# Altium PCB board.PcbDoc
Units mil, origin at the board's own origin, x right, y up, seen from the top; angles counter-clockwise.
Board outline 2755.91 x 1181.1 mil, 2 copper layers (Top Layer, Bottom Layer); 51 components, 43 nets, 225 pads, 159 vias.
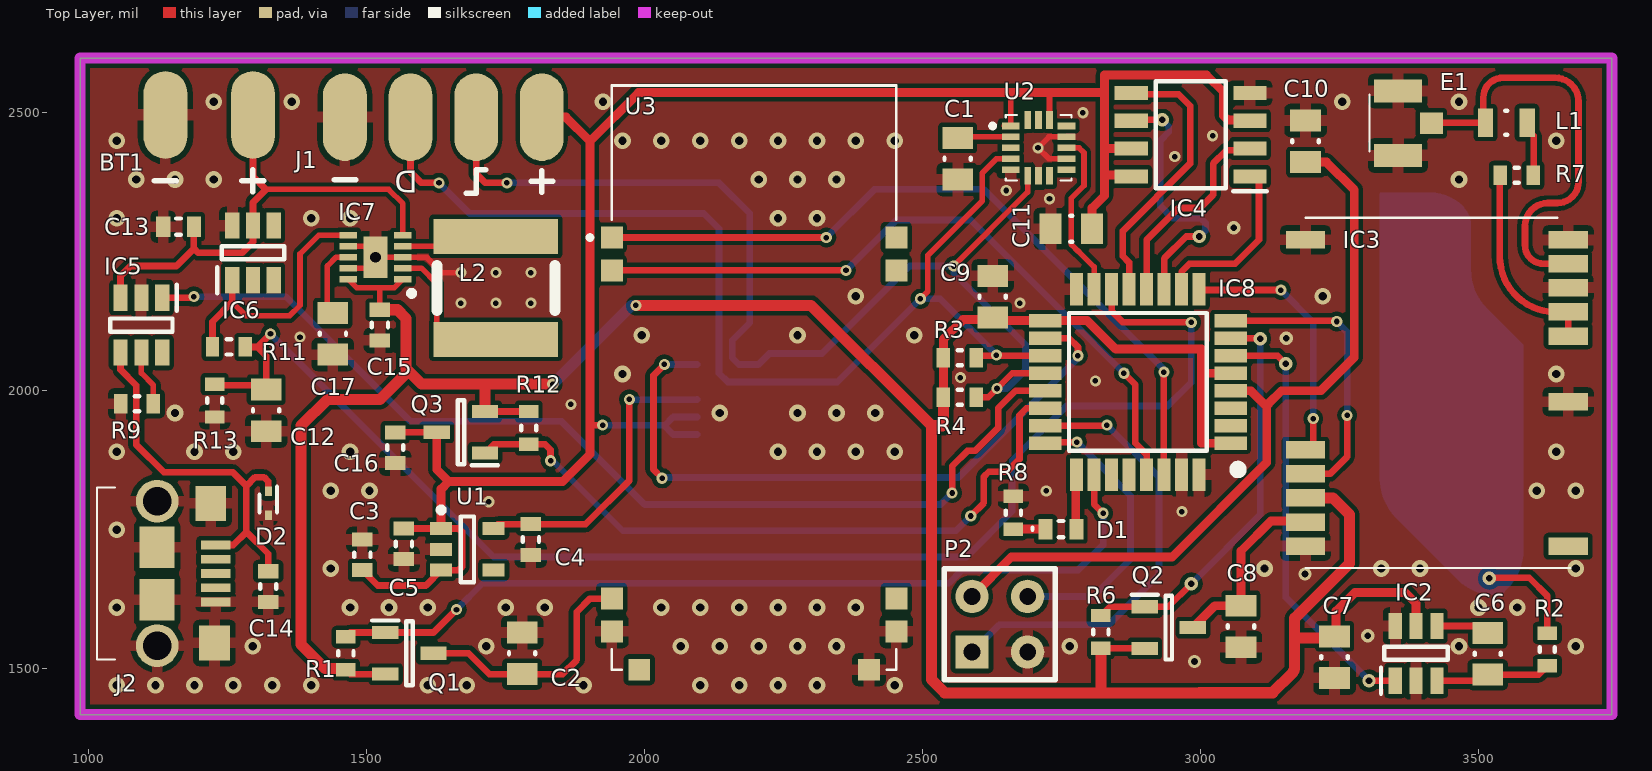
[diagram p0: Top Layer view]
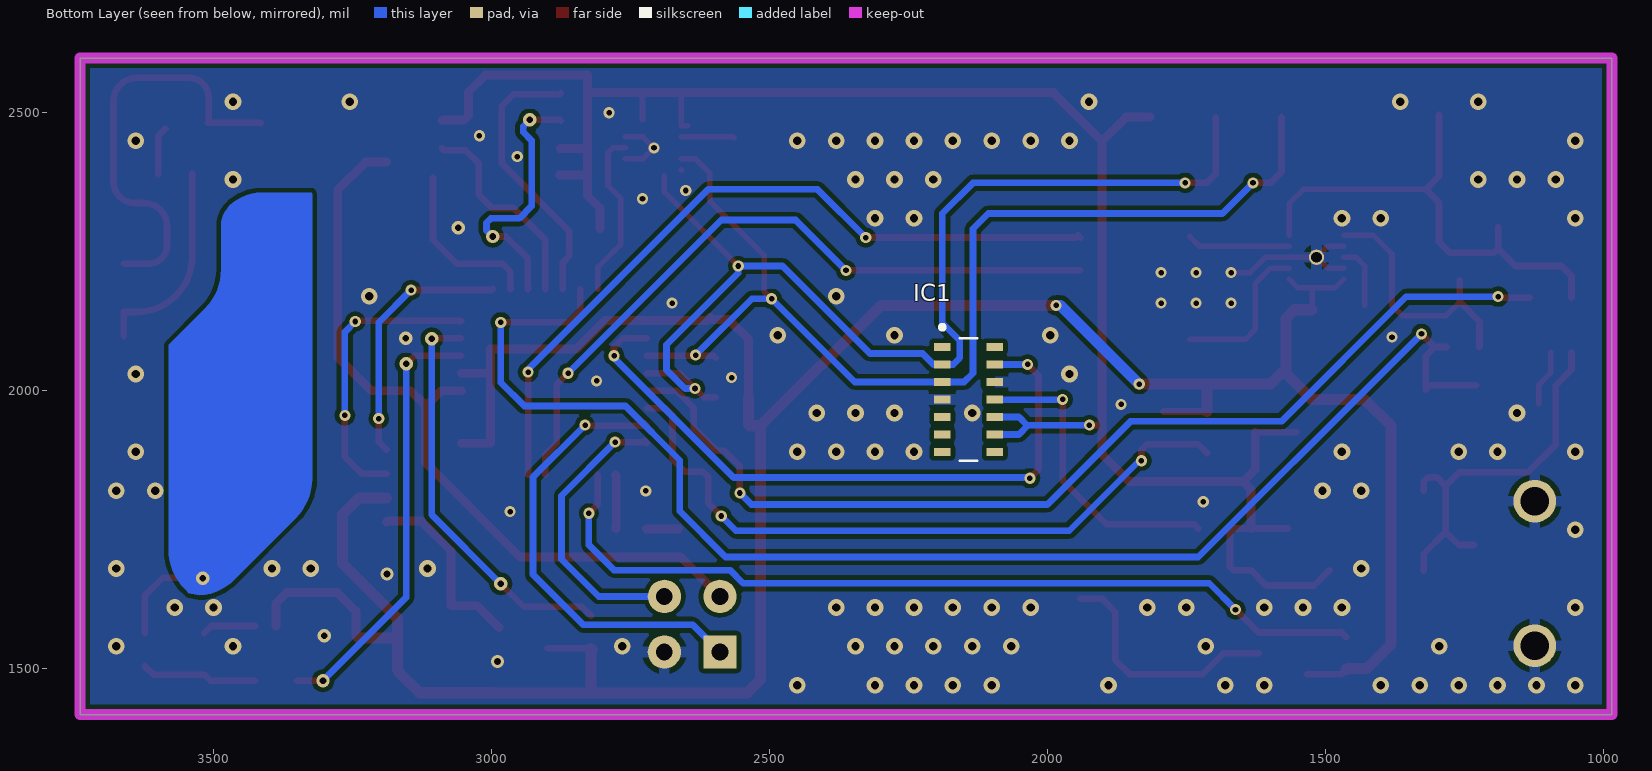
[diagram p1: Bottom Layer view, seen from below]
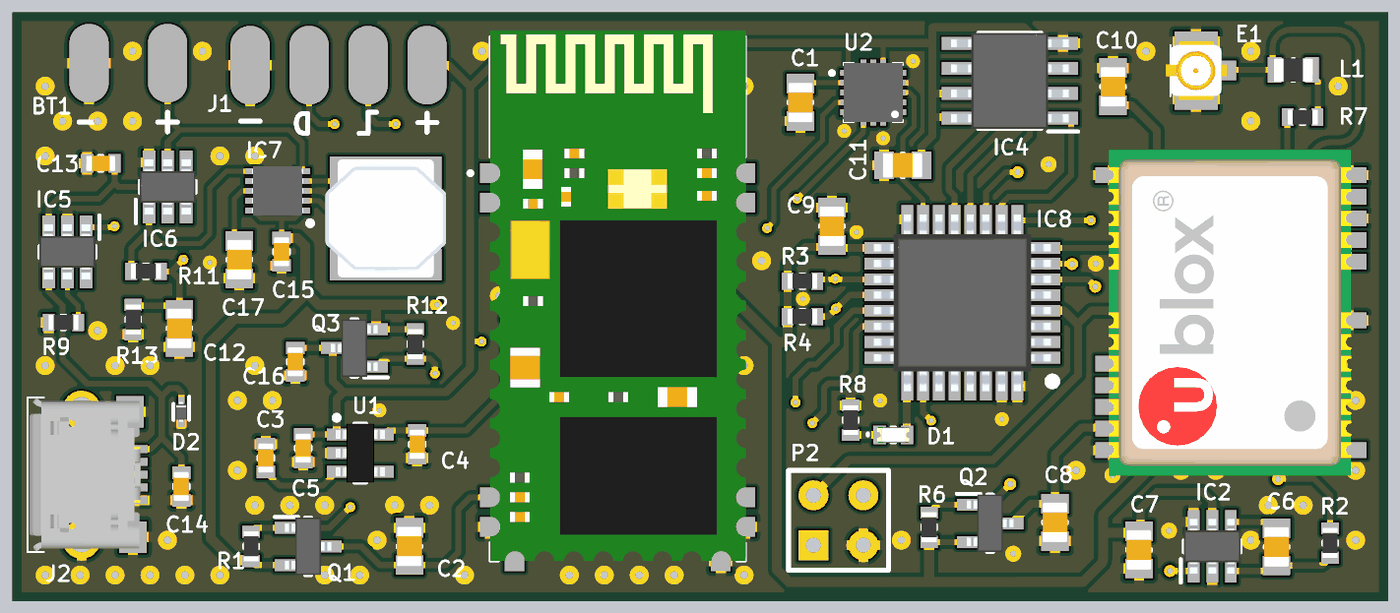
[diagram p2: 3D render of the assembled board from above, using the file's embedded part models]

## Layer stack, top to bottom
Top Solder: solder mask 0.4, Solder Resist, Dk 3.5
Top Layer: signal copper 1.4
Dielectric 1: dielectric 12.6, FR-4, Dk 4.8
Bottom Layer: signal copper 1.4
Bottom Solder: solder mask 0.4, Solder Resist, Dk 3.5

## Board outline
984.25,1417.32 3740.16,1417.32 3740.16,2598.43 984.25,2598.43

## Design rules (kind name [scope] priority, off if disabled: settings)
BoardOutlineClearance [All] p1: gap=7.87 ignorepadtopadclearanceinfootprint=FALSE except(15.75: Arc-SplitBarrior Arc-SplitContinuation Track-SplitBarrior Track-SplitContinuation SMDPad-SplitBarrior SMDPad-SplitContinuation THPad-SplitBarrior THPad-SplitContinuation Via-SplitBarrior Via-SplitContinuation Fill-SplitBarrior Fill-SplitContinuation Poly-SplitBarrior Poly-SplitContinuation Region-SplitBarrior Region-SplitContinuation Text-SplitBarrior Text-SplitContinuation)
Clearance "Clearance Bottom Layer" [OnLayer('Bottom Layer')] p1: gap=8 ignorepadtopadclearanceinfootprint=TRUE except(10: Arc-Text Track-Text SMDPad-Text THPad-Text Via-Text Fill-Text Poly-Text Region-Text Text-Text)
Clearance "Clearance Top Layer" [OnLayer('Top Layer')] p2: gap=8 ignorepadtopadclearanceinfootprint=TRUE except(10: Arc-Text Track-Text SMDPad-Text THPad-Text Via-Text Fill-Text Poly-Text Region-Text Text-Text)
Clearance [All] p3: gap=7.87 ignorepadtopadclearanceinfootprint=FALSE except(3.5: Arc-Arc Arc-Track Arc-SMDPad Track-Track Track-SMDPad SMDPad-SMDPad; 5: Arc-Via Track-Via SMDPad-Via THPad-Via Via-Via; 10: Arc-Text Track-Text SMDPad-Text THPad-Text Via-Text Fill-Text Poly-Text Region-Text Text-Text)
HoleSize [All] p1: absolutevalues=TRUE maxlimit=248.03 minlimit=7.87 maxpercent=80.000 minpercent=20.000
MinimumAnnularRing [All] p1: minimumring=3
MinimumSolderMaskSliver [All] p1: minsoldermaskwidth=3.94
PolygonConnect PolygonConnect_1 [All] p1: thpad.connectstyle=Relief thpad.reliefconductorwidth=20 thpad.reliefentries=4 thpad.polygonreliefangle="90 Angle" thpad.airgapwidth=10 smdpad.connectstyle=Relief smdpad.reliefconductorwidth=20 smdpad.reliefentries=4 smdpad.polygonreliefangle="90 Angle" smdpad.airgapwidth=10 via.connectstyle=Direct via.reliefconductorwidth=20 via.reliefentries=4 via.polygonreliefangle="90 Angle" via.airgapwidth=10
RoutingCorners [All] p1: cornerstyle=Round minsetback=100 maxsetback=100
RoutingVias [All] p1: holewidth=19.68 width=39.37 viastyle="Through Hole" minholewidth=7.87 minwidth=17.72 maxholewidth=39.37 maxwidth=78.74
SilkToSilkClearance [All] p1: silktosilkclearance=3.94
SilkToSolderMaskClearance [IsPad] p1: minsilkscreentomaskgap=3.94 clearancetoexposedcopper=TRUE
SolderMaskExpansion [All] p1: expansion=4
Width [All] p1: maxlimit=100 minlimit=3.5 preferedwidth=15
25 further rules are at their usual default settings.

## Classes and differential pairs
component class U_zasilanie: BT1 C12 C13 C14 C15 C16 C17 D2 IC5 IC6 IC7 J2 L2 Q3 R9 R11 R12 R13
component class U_pamiec_zewnetrzna: C11 IC4
component class U_oled: J1
component class U_mikrokontroler: C9 C10 D1 IC8 P2 R3 R4 R8
component class U_GPS: C8 E1 IC3 L1 Q2 R6 R7
component class U_czujnik_tetna: C3 C4 C5 IC1 U1
component class U_czujnik_dotyku: C6 C7 IC2 R2
component class U_bluetooth: C2 Q1 R1 U3
component class U_akcelerometr: C1 U2

## Components (designator, comment, footprint, x,y, rotation, side; value= is the part's Value field where it differs from the comment)
BT1 "Battery" BAT_PAD 1295.28,2496.06 r180 top
C1 "Cap" C0805 2562.99,2417.32 r90 top value=100nF
C2 "Cap" C0805 1779.53,1527.56 r270 top value=100nF
C3 "Cap" cap-0603 1492.13,1704.72 r270 top value=1uF
C4 "Cap" cap-0603 1795.28,1732.28 r90 top value=1uF
C5 "Cap" cap-0603 1566.93,1724.41 r90 top value=1uF
C6 "Cap" C0805 3516.73,1526.57 r270 top value=10nF
C7 "Cap" C0805 3241.14,1520.67 r90 top value=100nF
C8 "Cap" C0805 3072.83,1575.79 r90 top value=100nF
C9 "Cap" C0805 2625.98,2169.29 r270 top value=100nF
C10 "Cap" C0805 3188.98,2448.82 r270 top value=100nF
C11 "Cap" C0805 2767.72,2291.34 r0 top value=100nF
C12 "Cap" C0805 1318.9,1964.57 r90 top value=100nF
C13 "Cap" cap-0603 1161.42,2295.28 r0 top value=1uF
C14 "Cap" cap-0603 1322.83,1647.64 r90 top value=10uF
C15 "Cap" cap-0603 1523.62,2118.11 r90 top value=10uF
C16 "Cap" cap-0603 1551.18,1897.64 r90 top value=1uF
C17 "Cap" C0805 1438.98,2102.36 r90 top value=100nF
D1 "LL-S192PUAC-2A" LED_0603 2749.02,1750.98 r0 top
D2 "ESD9L5.0ST5G" SODFL1006X40N 1322.83,1797.24 r270 top
E1 "SMT" UFLRSMT160 3355.32,2481.3 r90 top
IC1 "MAX30102" MAX30102EFDT 2141.73,1984.25 r180 bottom
IC2 "AT42QT1010-TSHR" SOT95P280X145-6N 3387.8,1527.56 r90 top
IC3 "GPS" NEO6M0001_only_used_pins 3444.88,1996.06 r0 top
IC4 "AT25SF161-SSHD-B" SOIC127P600X175-8N 2982.28,2460.63 r180 top
IC5 "MCP73811T-420IT" SOT95P280X135-6N 1094.49,2118.11 r270 top
IC6 "DW01A-G" SOT95P280X135-6N 1295.28,2248.03 r90 top
IC7 "TPS63031" SON50P250X250X80-11N-D 1515.75,2240.16 r180 top
IC8 "STM32L031K6T6" QFP80P900X900X160-32N 2887.32,2015.75 r180 top
J1 "Pads for wires to solder" OLED_PAD 1814.96,2492.13 r180 top
J2 "Micro USB" 101181930001LF 1125.98,1671.26 r270 top
L1 "Inductor" L-0805 3550.2,2482.28 r180 top value=27uH
L2 "DJNR6028-1R5-S" DJNR6028-1R5-S 1732.28,2185.04 r270 top value=1.5uH
P2 "Header 2X2" 2x2_header 2988.98,1629.92 r90 top
Q1 "FDN306P" SOT95P237X112-3N 1576.77,1527.56 r0 top
Q2 "FDN306P" SOT95P237X112-3N 2942.91,1573.82 r0 top
Q3 "FDN306P" SOT95P237X112-3N 1669.29,1925.2 r180 top
R1 "Res3" R0603 1462.6,1527.56 r270 top value=100k
R2 "Res3" R0603 3624.02,1534.45 r90 top value=10k
R3 "Res3" R0603 2566.93,2059.06 r180 top value=2K2
R4 "Res3" R0603 2566.93,1988.19 r180 top value=2K2
R6 "Res3" R0603 2820.87,1565.94 r270 top value=100k
R7 "" R0603 3568.9,2387.8 r0 top value=22R
R8 "Res3" R0603 2663.39,1780.51 r270 top value=150R
R9 "Res3" R0603 1086.61,1976.38 r0 top value=12k
R11 "Res3" R0603 1251.97,2078.74 r0 top value=33k
R12 "Res3" R0603 1791.34,1933.07 r90 top value=100k
R13 "Res3" R0603 1226.38,1982.28 r270 top value=10k
U1 "MIC5504" SOT23-5 1681.1,1714.57 r0 top
U2 "MMA8452Q" QFN-16 2708.66,2437.01 r0 top
U3 "HC-06" HC-06_footprint_minimal_pin_number 2196.85,2019.68 r0 top locked

## Footprints (in the part's own frame and the unit in brackets; to place one, negate y for a bottom-side part, rotate by r counter-clockwise, add the part's x,y. Pads: shape width x height; smd on the part's side, far side on the other; paste and mask are expansions set on the pad)
2x2_header [mil]
  rect 60x60 hole 30: 1(-100,400)
  round 60 hole 30: 2(0,400) 3(0,300) 4(-100,300)
  silkscreen extent -150,250 50,450
101181930001LF [mm] "microUSB footprint"
  rect 0.4x1.35 smd: 1(-1.3,2.6) 2(-0.65,2.6) 3(0,2.6) 4(0.65,2.6) 5(1.3,2.6)
  round 1.95 hole 1.3: 6(-3.3,-0.075) 6(3.3,-0.075)
  rect 1.6x1.4 smd: 6(-3.2,2.375) 6(3.175,2.54)
  rect 1.9x1.6 smd: 6(-1.2,-0.075) 6(1.2,-0.075)
  silkscreen extent -3.93,-2.83 3.93,-2, body extent -3.93,-2.74 3.93,2.92, height 2.81
BAT_PAD [mm]
  oval 2x4 smd: 1(0,0) 2(4,0)
  silkscreen extent -0.5,2.5 4.5,3.5
C0805 [mm]
  rect 1x1.4 smd: 1(-0.95,0) 2(0.95,0)
  silkscreen extent -0.05,-0.6 0.05,0.6, body extent -1.01,-0.64 1.01,0.64, height 0.56
cap-0603 [mm]
  rect 0.64x0.94 smd: 1(-0.7,0) 2(0.7,0)
  silkscreen extent -0.1,-0.37 0.1,0.37, body extent -0.75,-0.4 0.75,0.4, height 0.5
DJNR6028-1R5-S [mm]
  rect 1.6x5.7 smd: 1(-2.35,0) 2(2.35,0)
  silkscreen extent -1.02,-2.7 1.02,2.7, body extent -3,-3.07 3,3.07, height 2.58
HC-06_footprint_minimal_pin_number [mm]
  rect 1x1 smd: 1(-6.5,6.5) 2(-6.5,5) 12(-6.5,-10) 13(-6.5,-11.5) 14(-5.25,-13.25) 21(5.25,-13.25) 22(6.5,-11.5) 23(6.5,-10) 33(6.5,5) 34(6.5,6.5)
  silkscreen extent -7.6,-13.25 6.5,13.45, body extent -6.48,-13.25 6.52,13.75, height 4.32
L-0805 [mm]
  rect 0.7x1.3 smd: 1(-0.95,0) 2(0.95,0)
  silkscreen extent -0.05,-0.55 0.05,0.55, body extent -1,-0.6 1,0.6, height 0.5
LED_0603 [mm]
  rect 0.64x0.94 smd: 1(0.7,0) 2(-0.7,0)
  silkscreen extent -1.3,-0.37 0.1,0.37, body extent -0.81,-0.4 0.81,0.4, height 0.6
MAX30102EFDT [mm]
  rect 0.75x0.35 smd: 1(-1.2,2.4) 2(-1.2,1.6) 3(-1.2,0.8) 4(-1.2,0) 5(-1.2,-0.8) 6(-1.2,-1.6) 7(-1.2,-2.4) 8(1.2,-2.4) 9(1.2,-1.6) 10(1.2,-0.8) 11(1.2,0) 12(1.2,0.8) 13(1.2,1.6) 14(1.2,2.4)
  silkscreen extent -1.3,-2.8 0.4,3.4, body extent -1.65,-2.8 1.65,2.8, height 1.75
NEO6M0001_only_used_pins [mm]
  rect 1.8x0.8 smd: 1(5.5,-7) 7(5.5,-0.4) 8(5.5,2.6) 9(5.5,3.7) 10(5.5,4.8) 11(5.5,5.9) 12(5.5,7) 13(-6.5,7) 20(-6.5,-2.6) 21(-6.5,-3.7) 22(-6.5,-4.8) 23(-6.5,-5.9) 24(-6.5,-7)
  silkscreen extent -6.5,-8 5.6,8, body extent -6.73,-8.3 5.63,8.3, height 2.64
OLED_PAD [mm]
  oval 2x4 smd: 1(0,0) 2(3,0) 3(6,0) 4(9,0)
  silkscreen extent -0.5,2.4 9.48,3.47
QFN-16 [mm]
  rect 0.813x0.305 smd: 1(-1.275,1) 2(-1.275,0.5) 3(-1.275,0) 4(-1.275,-0.5) 5(-1.275,-1) 9(1.275,-1) 10(1.275,-0.5) 11(1.275,0) 12(1.275,0.5) 13(1.275,1)
  rect 0.305x0.813 smd: 6(-0.5,-1.275) 7(0,-1.275) 8(0.5,-1.275) 14(0.5,1.275) 15(0,1.275) 16(-0.5,1.275)
  silkscreen extent -2.2,-1.5 1.5,1.5, body extent -1.5,-1.5 1.5,1.5, height 1.06
QFP80P900X900X160-32N [mm]
  rect 1.475x0.6 smd: 1(-4.238,2.8) 2(-4.238,2) 3(-4.238,1.2) 4(-4.238,0.4) 5(-4.238,-0.4) 6(-4.238,-1.2) 7(-4.238,-2) 8(-4.238,-2.8) 17(4.238,-2.8) 18(4.238,-2) 19(4.238,-1.2) 20(4.238,-0.4) 21(4.238,0.4) 22(4.238,1.2) 23(4.238,2) 24(4.238,2.8)
  rect 0.6x1.475 smd: 9(-2.8,-4.238) 10(-2,-4.238) 11(-1.2,-4.238) 12(-0.4,-4.238) 13(0.4,-4.238) 14(1.2,-4.238) 15(2,-4.238) 16(2.8,-4.238) 25(2.8,4.238) 26(2,4.238) 27(1.2,4.238) 28(0.4,4.238) 29(-0.4,4.238) 30(-1.2,4.238) 31(-2,4.238) 32(-2.8,4.238)
  silkscreen extent -4.77,-3.15 3.15,4.2, body extent -4.5,-4.5 4.5,4.5, height 1.6
R0603 [mil]
  rect 24x35 smd: 1(-29.5,0) 2(29.5,0)
  silkscreen extent -4,-14 4,14, body extent -30,-15 30,15, height 18
SODFL1006X40N [mm]
  rect 0.43x0.32 smd: 1(-0.55,0) 2(0.55,0)
  silkscreen extent -0.76,-0.4 0.4,0.4, body extent -0.5,-0.3 0.5,0.3, height 0.4
SOIC127P600X175-8N [mm]
  rect 1.525x0.65 smd: 1(-2.712,1.905) 2(-2.712,0.635) 3(-2.712,-0.635) 4(-2.712,-1.905) 5(2.712,-1.905) 6(2.712,-0.635) 7(2.712,0.635) 8(2.712,1.905)
  silkscreen extent -3.47,-2.45 1.6,2.58, body extent -3,-2.45 3,2.45, height 1.75
SON50P250X250X80-11N-D [mm]
  rect 0.8x0.3 smd: 1(-1.25,1) 2(-1.25,0.5) 3(-1.25,0) 4(-1.25,-0.5) 5(-1.25,-1) 6(1.25,-1) 7(1.25,-0.5) 8(1.25,0) 9(1.25,0.5) 10(1.25,1)
  round 0.7 hole 0.5: 11(0,0)
  rect 1.1x1.9 smd: 11(0.002,0)
  silkscreen extent -1.78,1.53 -1.53,1.77, body extent -1.3,-1.25 1.3,1.25, height 0.8
SOT23-5 [mm] "SOT23, 5-Leads, Body 2,90x2,45mm, Pitch 0,95mm, IPC Medium Density"
  rect 1x0.6 smd: 1(-1.2,0.95) 2(-1.2,0) 3(-1.2,-0.95) 4(1.2,-0.95) 5(1.2,0.95)
  silkscreen extent -1.32,-1.5 0.3,1.92, body extent -1.25,-1.5 1.25,1.5, height 1.11
SOT95P237X112-3N [mm]
  rect 1.2x0.6 smd: 1(-1.1,0.95) 2(-1.1,-0.95) 3(1.1,0)
  silkscreen extent -1.7,-1.46 0.15,1.5, body extent -1.18,-1.46 1.18,1.46, height 1.12
SOT95P280X135-6N [mm]
  rect 1.2x0.65 smd: 1(-1.25,0.95) 2(-1.25,0) 3(-1.25,-0.95) 4(1.25,-0.95) 5(1.25,0) 6(1.25,0.95)
  silkscreen extent -1.85,-1.43 0.3,1.63, body extent -1.4,-1.43 1.4,1.43, height 1.35
SOT95P280X145-6N [mm]
  rect 1.2x0.6 smd: 1(-1.25,0.95) 2(-1.25,0) 3(-1.25,-0.95) 4(1.25,-0.95) 5(1.25,0) 6(1.25,0.95)
  silkscreen extent -1.85,-1.45 0.3,1.6, body extent -1.4,-1.45 1.4,1.45, height 1.45
UFLRSMT160 [mm]
  rect 1x1.05 smd: 1(0,-1.525)
  rect 1.05x2.2 smd: 2(-1.475,0) 2(1.475,0)
  silkscreen extent -1.3,1.3 1.3,1.3, body extent -1.5,-1.55 1.5,1.55, height 1.27

## Part data
BT1: "Multicell Battery", LatestRevisionDate=17-Jul-2002, LatestRevisionNote="Re-released for DXP Platform.", PackageDescription="Battery; 2 Leads", PackageReference=BAT-2, Published=24-Mar-1999, Publisher="Altium Limited"
C1 C2 C3 C4 C5 C6 C7 C8 C9 C10 C11 C12 C13 C14 C15 C16 C17: "Capacitor", LatestRevisionDate=17-Jul-2002, LatestRevisionNote="Re-released for DXP Platform.", PackageDescription="Radial Cap, Thru-Hole; 2 Leads; 0.3 in Pin Spacing", PackageReference=RAD-0.3, Published=8-Jun-2000, Publisher="Altium Limited"
D1: library part LED3, "Typical BLUE SiC LED", DatasheetVersion=16-Apr-2002, LatestRevisionDate=17-Dec-2003, LatestRevisionNote="PCB Footprint replaced.", PackageDescription="SM LED; 2 C-Bend Leads; Body 3.5 x 2.8 x 1.9 mm, inc leads (LxWxH typ)", PackageReference=3.5X2.8X1.9, PackageVersion=16-Apr-2002, Published=8-Jun-2000, Publisher="Altium Limited"
D2: "Transil", Manufacturer_Name="ON Semiconductor", Mouser Part Number=863-ESD9L5.0ST5G, Arrow Part Number=ESD9L5.0ST5G, Arrow Price/Stock=https://www.arrow.com/en/products/esd9l5.0st5g/on-semiconductor, Datasheet Link=http://www.onsemi.com/pub/Collateral/ESD9L-D.PDF, Height=0.4mm, Manufacturer_Part_Number=ESD9L5.0ST5G, Mouser Price/Stock=https://www.mouser.co.uk/ProductDetail/ON-Semiconductor/ESD9L50ST5G?qs=lq5%252BOP7PS0%252BtbEEODUxZiA%3D%3D
E1: library part SMT_antenne
IC1: library part MAX30102EFD+T, "https://datasheets.maximintegrated.com/en/ds/MAX30102.pdf", Manufacturer_Name="Maxim Integrated", Mouser Part Number=700-MAX30102EFD+T, Arrow Part Number=MAX30102EFD+T, Datasheet Link=https://datasheets.maximintegrated.com/en/ds/MAX30102.pdf, Height=1.65mm, Manufacturer_Part_Number=MAX30102EFD+T, Mouser Price/Stock=https://www.mouser.co.uk/ProductDetail/Maxim-Integrated/MAX30102EFD%2bT?qs=nVS1qgv%252BQrkHA4%2FoFYriFA%3D%3D
IC2: "capacitive touch sensor", Manufacturer_Name=Microchip, Mouser Part Number=556-AT42QT1010-TSHR, Arrow Part Number=AT42QT1010-TSHR, Arrow Price/Stock=https://www.arrow.com/en/products/at42qt1010-tshr/microchip-technology, Datasheet Link=http://www.atmel.com/images/atmel-9541-at42-qtouch-bsw-at42qt1010_datasheet.pdf, Height=1.45mm, Manufacturer_Part_Number=AT42QT1010-TSHR, Mouser Price/Stock=https://www.mouser.co.uk/ProductDetail/Microchip-Technology/AT42QT1010-TSHR?qs=xbJoyvfFV%2F%252BFK88JVR2efg%3D%3D
IC3: library part NEO-6M-0-001, "GPS modle", Manufacturer_Name=U-Blox, Arrow Part Number=NEO-6M-0-001, Datasheet Link=https://www.u-blox.com/sites/default/files/products/documents/NEO-6_DataSheet_%28GPS.G6-HW-09005%29.pdf, Height=2.6mm, Manufacturer_Part_Number=NEO-6M-0-001
IC4: library part AT25SF081-SSHD-B, "flash memory SPI", Manufacturer_Name="Adesto Technologies", Mouser Part Number=988-AT25SF081-SSHD-B, Arrow Part Number=AT25SF081-SSHD-B, Arrow Price/Stock=https://www.arrow.com/en/products/at25sf081-sshd-b/adesto-technologies-corporation-inc, Datasheet Link=https://www.mouser.com/datasheet/2/590/DS-AT25SF081_045-1385733.pdf, Height=1.75mm, Manufacturer_Part_Number=AT25SF081-SSHD-B, Mouser Price/Stock=https://www.mouser.com/Search/Refine.aspx?Keyword=988-AT25SF081-SSHD-B
IC5: library part MCP73831T, "Integrated Circuit", Arrow Part Number=MCP73831T-5ACI/OT, Manufacturer_Name=Microchip, Mouser Part Number=579-MCP73831T5ACIOT, Arrow Price/Stock=https://www.arrow.com/en/products/mcp73831t-5aciot/microchip-technology, Datasheet Link=http://www.microchip.com/mymicrochip/filehandler.aspx?ddocname=en025112, Height=1.45mm, Manufacturer_Part_Number=MCP73831T-5ACI/OT, Mouser Price/Stock=https://www.mouser.co.uk/ProductDetail/Microchip-Technology/MCP73831T-5ACI-OT?qs=hH%252BOa0VZEiAcgAcEkuamXg%3D%3D
IC6: "Integrated Circuit", Manufacturer_Name="Fortune Semiconductor Corporation", Arrow Part Number=DW01A-G, Datasheet Link=http://acoptex.com/uploads/DW01A.pdf, Height=1.35mm, Manufacturer_Part_Number=DW01A-G
IC7: library part TPS63031DSKT, "TPS63031 buck-boost 3v3", Manufacturer_Name="Texas Instruments", Mouser Part Number=595-TPS63031DSKT, Arrow Part Number=TPS63031DSKT, Arrow Price/Stock=https://www.arrow.com/en/products/tps63031dskt/texas-instruments, Datasheet Link=http://www.ti.com/lit/gpn/tps63031, Height=0.8mm, Manufacturer_Part_Number=TPS63031DSKT, Mouser Price/Stock=https://www.mouser.co.uk/ProductDetail/Texas-Instruments/TPS63031DSKT?qs=ptj1V1atRArBpxn4nGxMNw%3D%3D
IC8: "Integrated Circuit", Manufacturer_Name=STMicroelectronics, Mouser Part Number=511-STM32L031K6T6, Arrow Part Number=STM32L031K6T6, Arrow Price/Stock=https://www.arrow.com/en/products/stm32l031k6t6/stmicroelectronics, Datasheet Link=https://www.st.com/resource/en/datasheet/stm32l031k6.pdf, Height=1.6mm, Manufacturer_Part_Number=STM32L031K6T6, Mouser Price/Stock=https://www.mouser.co.uk/ProductDetail/STMicroelectronics/STM32L031K6T6?qs=mwoc%252BQmZlGIAMyWzQ3GanA%3D%3D
J1: library part OLED_connector
J2: library part USB-10118193-0001LF, "model 10118193-0001LF amphenol", Arrow Part Number=10118193-0001LF, Manufacturer_Name=Amphenol, Mouser Part Number=649-10118193-0001LF, Arrow Price/Stock=https://www.arrow.com/en/products/10118193-0001lf/amphenol-fci, Datasheet Link=https://componentsearchengine.com/Datasheets/1/10118193-0001LF.pdf, Height=3.1mm, Manufacturer_Part_Number=10118193-0001LF, Mouser Price/Stock=https://www.mouser.co.uk/ProductDetail/Amphenol-FCI/10118193-0001LF?qs=Ywefl8B65e63Nsqd%252B8HZaQ%3D%3D
L2: library part Inductor, Code_IEC=1005, Code_JEITA=0402, LatestRevisionDate=29-May-2009, LatestRevisionNote="IPC-7351 Footprint Added.", PackageDescription="Chip Inductor", PackageReference=0402-A, Published=8-Jun-2000, Publisher="Altium Limited"
P2: "Header, 2-Pin, Dual row", LatestRevisionDate=17-Jul-2002, LatestRevisionNote="Re-released for DXP Platform.", Publisher="Altium Limited"
Q1 Q2 Q3: "MOSFET (P-Channel)", Manufacturer_Name="ON Semiconductor", Mouser Part Number=512-FDN306P, Arrow Part Number=FDN306P, Arrow Price/Stock=https://www.arrow.com/en/products/fdn306p/on-semiconductor, Datasheet Link=http://uk.rs-online.com/web/p/products/1241702, Height=1.12mm, Manufacturer_Part_Number=FDN306P, Mouser Price/Stock=https://www.mouser.co.uk/ProductDetail/ON-Semiconductor-Fairchild/FDN306P?qs=GeD7q9OHBPy9Kkc110idSQ%3D%3D
R1 R2 R3 R4 R6 R8 R9 R11 R12 R13: "Resistor", LatestRevisionDate=29-May-2009, LatestRevisionNote="IPC-7351 Footprint Added.", PackageDescription="Chip Resistor", PackageReference=J1-0603, Published=8-Jun-2000, Publisher="Altium Limited"
R7: library part Res3, "Resistor", LatestRevisionDate=29-May-2009, LatestRevisionNote="IPC-7351 Footprint Added.", PackageDescription="Chip Resistor", PackageReference=J1-0603, Published=8-Jun-2000, Publisher="Altium Limited"
U1: "http://ww1.microchip.com/downloads/en/DeviceDoc/21813F.pdf"
U2: library part MMA8452QR1, "Accelerometer", Manufacturer_Name=NXP, Mouser Part Number=841-MMA8452QR1, Arrow Part Number=MMA8452QR1, Arrow Price/Stock=https://www.arrow.com/en/products/mma8452qr1/nxp-semiconductors, Datasheet Link=http://www.nxp.com/docs/en/data-sheet/MMA8452Q.pdf, Height=1mm, Manufacturer_Part_Number=MMA8452QR1, Mouser Price/Stock=https://www.mouser.co.uk/ProductDetail/NXP-Semiconductors/MMA8452QR1?qs=nf24X8JpkflP9lEXYucw7A%3D%3D
U3: "HC-06 bluetooth module"
L1: Code_IEC=1005, Code_JEITA=0402, LatestRevisionDate=29-May-2009, LatestRevisionNote="IPC-7351 Footprint Added.", PackageDescription="Chip Inductor", PackageReference=0402-A, Published=8-Jun-2000, Publisher="Altium Limited"

## Via types
v1: diameter 30, hole 15, Top Layer to Bottom Layer, 96 vias
v2: diameter 20, hole 10, Top Layer to Bottom Layer, 51 vias
v3: diameter 24, hole 12, Top Layer to Bottom Layer, 12 vias

## Nets (pads, with @x,y where several pads share a name; then routed paths per layer and width w, separated by ;. In a path a pad name is that pad's centre, name@x,y a point inside that pad or via, vN(x,y) a via of type N, cw(c..) or ccw(c..) an arc to the next point about the centre after c; other vN are vias at no path point)
1V8: C4.2 IC1.11 U1.5 | length 548.1
  Top Layer w12: U1.5 1736.22,1759.84 C4.2 1893.7,1759.84 1972.44,1838.58 v2(1972.44,1984.25)
  Bottom Layer w12: v2(1972.44,1984.25) 1972.88,1983.81 2094.05,1983.81 IC1.11
3V3: C7.2 C9.2 C15.2 IC2.5 IC3.22 IC7.1 IC7.10 IC8.1 IC8.5 IC8.17 Q1.2 Q2.2 Q3.2 R1.2 R3.2 R4.2 R6.2 R12.2 | length 5320.2
  Top Layer w10: IC7.10 1482.28,2185.04 1523.62,2185.04 ; C15.2 1523.62,2185.04 ; IC7.1 1549.21,2185.04 1523.62,2185.04
  Top Layer w12: R1.2 1470.5,1490.16 Q1.2 ; Q3.2 R12.2 ; R6.2 Q2.2
  Top Layer w16: R4.2 R3.2 2537.43,2092.55 2572.83,2127.95 2602.36,2127.95 2606.3,2131.89 2612.2,2125.98 IC8.17 2796.26,2125.98 2847.44,2074.8 3001.97,2074.8 3001.97,2031.5 ; IC8.1 3001.97,1905.51 3001.97,2031.5 ; IC8.5 3001.97,2031.5 ; C7.2 3244.09,1561.02 3244.09,1603.35 3277.56,1636.81 3368.11,1636.81 3387.8,1617.13 IC2.5
  Top Layer w20: R1.2 1460.66,1500 1425.2,1500 1381.89,1543.31 1381.89,1937.01 1429.13,1984.25 1523.62,1984.25 1574.8,2035.43 ; C15.2 1555.12,2145.67 1570.87,2129.92 1570.87,2039.37 1574.8,2035.43 ; Q3.2 1712.6,2011.81 ; v2(1834.65,2011.81) 1712.6,2011.81 ; v2(1984.25,2153.54) 2299.21,2153.54 2515.75,1937.01 ; R4.2 2537.43,1939 2535.43,1937.01 2515.75,1937.01 ; 2818.9,1456.19 2539.87,1456.19 2515.75,1480.32 2515.75,1937.01 ; R6.2@2818.9,1531.69 cw(c2825.62,1531.69) R6.2 2820.87,1456.19 2997.53,1456.19 2998.03,1456.69 3129.92,1456.69 3164.42,1491.19 ; 3164.43,1491.2 ccw(c3152.66,1502.95) 3169.29,1502.95 3169.29,1555.12 ; IC3.22 3238.19,1807.09 3267.72,1777.56 3267.72,1688.98 3169.29,1590.55 3169.29,1555.12 ; C7.2 3238.19,1555.12 3169.29,1555.12 ; 1574.8,2035.43 1598.43,2011.81 1712.6,2011.81
  Bottom Layer w20: v2(1834.65,2011.81) 1976.38,2153.54 v2(1984.25,2153.54)
3V3_PERIPH: C3.2 C5.2 C11.2 C16.2 IC1.9 IC1.10 IC4.3 IC4.7 IC4.8 J1.1 Q3.3 U1.1 U1.3 U2.1 U2.14 | length 3648.4
  Top Layer w10: U2.1@2646.65,2476.38 U2.1 2658.46,2536.42 ; U2.14 2728.35,2536.42
  Top Layer w12: C3.2 1519.69,1649.61 1606.3,1649.61 U1.3 1665.35,1677.17 1671.26,1683.07 1671.26,1746.06 1665.35,1751.97 U1.1 C5.2 ; C16.2 Q3.3 ; 1901.57,1937.01 1902.56,1937.99 v2(1924.21,1937.99)
  Top Layer w16: Q3.3 1625.98,1858.27 1647.64,1836.61 ; U1.1 1633.86,1822.83 1647.64,1836.61 ; J1.1 1858.27,2492.13 1901.57,2448.82 ; 2655.51,2536.42 1989.17,2536.42 1901.57,2448.82 ; 2658.46,2536.42 2747.05,2536.42 ; 2728.35,2536.42 2827.24,2536.42 ; C11.2 2805.12,2328.74 2827.24,2350.87 2827.24,2388.39 ; IC4.7 2827.64,2435.63 2827.24,2436.02 ; IC4.8@2877.48,2388.39 2827.24,2388.39 ; IC4.3 3087.48,2487.2 3049.21,2487.2 3041.34,2495.08 3041.34,2537.4 3010.83,2567.91 2827.24,2567.91 2827.24,2536.42 ; 1647.64,1836.61 1852.36,1836.61 1901.57,1885.83 1901.57,1937.01 1901.57,2448.82 ; 2827.24,2388.39 2827.24,2436.02 ; 2827.24,2436.02 2827.24,2536.42
  Bottom Layer w12: v2(1924.21,1937.99) 2034.45,1937.99 2035.43,1937.01 ; IC1.9 2051.18,1921.26 2035.43,1937.01 ; IC1.10 2051.18,1952.76 2035.43,1937.01
FLASH.C\S\: IC4.1 IC8.10 | length 307.9
  Top Layer w12: IC8.10@2964.57,2184.09 IC8.10 2966.06,2214.09 2980.32,2228.35 3062.01,2228.35 3105.32,2271.65 IC4.1@3105.32,2382.87
FLASH.MISO: IC4.2 IC8.12 | length 375.5
  Top Layer w12: IC8.12 2903.07,2271.18 2960.63,2328.74 2999.02,2328.74 3022.64,2352.36 3022.64,2408.46 3046.83,2432.66 3086.09,2432.66 IC4.2
FLASH.MOSI: IC4.5 IC8.13 | length 500.3
  Top Layer w12: IC8.13 2871.57,2230.58 2860.24,2241.91 2860.24,2287.4 2981.3,2408.46 2981.3,2512.8 2960.63,2533.46 2877.68,2533.46 IC4.5
FLASH.SCK: IC4.6 IC8.11 | length 482.3
  Top Layer w12: IC4.6 2877.09,2487.2 v3(2931.1,2487.2) ; IC8.11@2933.07,2184.09 IC8.11 2934.57,2237.72 2974.41,2277.56 v3(2998.03,2277.56)
  Bottom Layer w12: v3(2931.1,2487.2) 2942.91,2475.39 2942.91,2465.55 2927.74,2450.38 2927.74,2332.1 2949.8,2310.04 3000.98,2310.04 3008.86,2302.17 3008.86,2288.39 v3(2998.03,2277.56)
GND: BT1.2 C1.1 C2.1 C3.1 C4.1 C5.1 C7.1 C8.1 C9.1 C10.1 C11.1 C12.1 C13.1 C14.1 C15.1 C16.1 C17.1 D2.2 E1.2 IC1.4 IC1.12 IC2.2 IC2.6 IC3.7 IC3.10 IC3.12 IC3.13 IC3.24 IC4.4 IC5.2 IC6.6 IC7.3 IC7.7 IC7.9 IC7.11 IC8.16 IC8.31 IC8.32 J1.4 J2.5 J2.6 P2.4 R8.1 R9.1 R13.2 U1.2 U2.5 U2.7 U2.10 U2.12 U3.13 U3.21 U3.22 | length 399.7
  Top Layer w10: IC7.9 1495.98,2220.47 IC7.11@1515.67,2240.16 ; IC7.7 1495.98,2259.84 IC7.11@1515.67,2240.16 ; v2(1669.29,2212.6) 1635.16,2212.6 1607.6,2240.16 IC7.3 1515.75,2240.16 IC7.11@1515.67,2240.16 ; U2.5@2657.48,2396.65 U2.5 ; U2.10 2727.36,2417.32 v2(2707.68,2437.01) 2727.36,2456.69 U2.12
  other v1: 1050,1470 1120,1470 1190,1470 1260,1470 1330,1470 1400,1470 1610,1470 1680,1470 1890,1470 2100,1470 2170,1470 2240,1470 2310,1470 2450,1470 1295,1540 1715,1540 2065,1540 2135,1540 2205,1540 2275,1540 2345,1540 2765,1540 3465,1540 3675,1540 1050,1610 1470,1610 1540,1610 1610,1610 1750,1610 1820,1610 2030,1610 2100,1610 2170,1610 2240,1610 2310,1610 2380,1610 3500,1610 3570,1610 1435,1680 3115,1680 3325,1680 3395,1680 3675,1680 1050,1750 1435,1820 1505,1820 3605,1820 3675,1820 1050,1890 1190,1890 1260,1890 1470,1890 2240,1890 2310,1890 2380,1890 2450,1890 3640,1890 1155,1960 2135,1960 2275,1960 2345,1960 2415,1960 1960,2030 3640,2030 1995,2100 2275,2100 2485,2100 2380,2170 3220,2170 1050,2310 1400,2310 1470,2310 2240,2310 2310,2310 1085,2380 1155,2380 1225,2380 2205,2380 2275,2380 2345,2380 3465,2380 1050,2450 1960,2450 2030,2450 2100,2450 2170,2450 2240,2450 2310,2450 2380,2450 2450,2450 3640,2450 1225,2520 1365,2520 1925,2520 3255,2520 3465,2520
  other v2: 2966.54,1782.48 1719.49,1800.2 2722.44,1819.88 1867.13,1975.39 2811.02,2017.72 2567.91,2023.62 1379.92,2096.46 1669.29,2157.48 1732.28,2157.48 1795.28,2157.48 2675.2,2157.48 1732.28,2212.6 1795.28,2212.6 2728.35,2345.47 2650.59,2360.24 2953.74,2421.26 3021.65,2458.66 2788.39,2500
  other v3: 2989.17,1512.8 3301.18,1559.06 3187.99,1670.28 3154.53,2094.49 3060.04,2293.31
I2C.SCL: IC1.3 IC8.19 J1.3 R3.1 U2.4 | length 2025.2
  Top Layer w10: v2(2496.06,2165.35) 2509.32,2178.61 2509.32,2243.57 2607.28,2341.54 2607.28,2391.73 2632.87,2417.32 U2.4
  Top Layer w12: J1.3 1578.74,2393.7 1598.43,2374.02 v2(1629.92,2374.02) ; R3.1 2600.37,2062.99 IC8.19
  Bottom Layer w12: v2(1629.92,2374.02) 1685.04,2318.9 2106.3,2318.9 2133.86,2291.34 2133.86,2031.5 2149.61,2015.75 IC1.3 2346.46,2015.75 v2(2496.06,2165.35) 2531.5,2165.35 v2(2632.87,2063.98)
I2C.SDA: IC1.2 IC8.20 J1.2 R4.1 U2.6 | length 2037.9
  Top Layer w10: v2(2556.1,2224.41) 2688.98,2357.28 U2.6
  Top Layer w12: J1.2 1696.85,2390.75 1713.58,2374.02 v2(1751.97,2374.02) ; R4.1 2618.11,1988.19 2661.42,2031.5 IC8.20
  Bottom Layer w12: v2(1751.97,2374.02) 2133.86,2374.02 2188.98,2318.9 2188.98,2122.05 2157.48,2090.55 2157.48,2059.06 2169.29,2047.24 IC1.2 2204.72,2047.24 2224.41,2066.93 2318.9,2066.93 2476.38,2224.41 v2(2556.1,2224.41) 2556.1,2211.61 2685.04,2082.68 2685.04,2037.4 2651.57,2003.94 v2(2633.86,2003.94)
NetBT1_1: BT1.1 C13.2 IC5.3 IC6.5 IC7.5 | length 910.4
  Top Layer w10: 1318.9,2362.2 1539.37,2362.2 1564.96,2336.61 IC7.5
  Top Layer w12: IC5.3 1057.09,2206.69 1074.8,2224.41 1157.48,2224.41 1188.98,2255.91 ; C13.2 1188.98,2255.91 ; BT1.1 1295.28,2385.83 1318.9,2362.2 1295.28,2338.58 IC6.5 1295.28,2267.72 1275.59,2248.03 1196.85,2248.03 1188.98,2255.91
NetC1_2: C1.2 U2.2 | length 96.3
  Top Layer w10: C1.2 2564.96,2456.69 U2.2
NetC2_2: C2.2 Q1.3 U3.12 | length 443.4
  Top Layer w12: Q1.3 1683.07,1527.56 1720.47,1490.16 C2.2 1852.36,1490.16 1877.95,1515.75 1877.95,1602.36 1901.57,1625.98 U3.12
NetC6_1: C6.1 IC2.4 | length 96.8
  Top Layer w12: IC2.4 3503.94,1576.77 C6.1
NetC6_2: C6.2 IC2.3 R2.1 | length 209.8
  Top Layer w12: IC2.3 3505.91,1478.35 C6.2 3608.24,1489.17 R2.1
NetC8_2: C8.2 IC3.23 Q2.3 | length 340.7
  Top Layer w16: Q2.3 3025.59,1613.19 C8.2 3072.83,1711.61 3126.97,1765.75 3187.01,1765.75 IC3.23
NetC12_2: C12.2 IC8.14 R11.2 R13.1 | length 2541.8
  Top Layer w12: R13.1@1228.35,2009.82 1311.05,2009.82 C12.2 1318.9,2062.99 1303.15,2078.74 ; R11.2 1303.15,2078.74 ; v2@1326.77,2106.3 v2(1326.77,2102.36) 1303.15,2078.74 ; IC8.14 2840.08,2143.19 2860.24,2123.03 v2(2983.27,2123.03)
  Bottom Layer w12: v2(1326.77,2102.36) 1351.2,2077.93 1387.97,2041.16 1728.35,1700.79 2578.74,1700.79 2661.42,1783.46 2661.42,1875 2758.86,1972.44 2940.94,1972.44 2983.27,2014.76 v2(2983.27,2123.03)
NetC14_2: C14.2 D2.1 IC5.4 J2.1 | length 704.3
  Top Layer w12: IC5.4 1057.09,2037.91 1085.11,2009.88 1085.11,1903.07 1134.75,1853.44 1258.76,1853.44 1283.46,1828.74 ; J2.1@1232.28,1722.44 1259.84,1722.44 1283.46,1746.06 ; C14.2 1322.83,1706.69 1283.46,1746.06 ; D2.1 1322.83,1836.61 1314.96,1844.49 1299.21,1844.49 1283.46,1828.74 ; 1283.46,1746.06 1283.46,1828.74
NetC17_2: C17.2 IC7.8 | length 114.8
  Top Layer w10: C17.2@1429.13,2153.54 1429.13,2224.41 1444.88,2240.16 IC7.8
NetD1_1: D1.1 IC8.25 | length 99.7
  Top Layer w16: D1.1@2777.09,1753.46 2775.59,1751.97 2775.59,1847.4 IC8.25
NetD1_2: D1.2 R8.2 | length 58.1
  Top Layer w16: R8.2 D1.2@2721.43,1751.01
NetE1_1: E1.1 IC3.11 L1.2 | length 775
  Top Layer w12: E1.1 cw(c3416.34,2481.3) 3416.34,2482.28 3510.2,2482.28 cw(c3510.2,2483.62) 3508.86,2483.62 3508.86,2527.56 cw(c3544.29,2527.56) 3544.29,2562.99 3637.8,2562.99 cw(c3637.8,2520.67) 3680.12,2520.67 3680.12,2375.98 cw(c3641.73,2375.98) 3641.73,2337.6 3625,2337.6 ccw(c3625,2296.26) 3583.66,2296.26 3583.66,2261.81 ccw(c3617.13,2261.81) 3617.13,2228.35 IC3.11
NetIC1_13: IC1.13 IC8.18 | length 1201.4
  Top Layer w12: v2(2031.5,1842.52) 2015.75,1858.27 2015.75,2027.56 v2(2035.43,2047.24) ; IC8.18 2763.78,2094.49 2779.53,2078.74 v2(2779.53,2062.99)
  Bottom Layer w12: v2(2031.5,1842.52) 2032.92,1843.94 2564.42,1843.94 2779.53,2059.06 v2(2779.53,2062.99) ; v2(2035.43,2047.24) IC1.13
NetIC2_1: IC2.1 IC8.6 | length 784.6
  Top Layer w12: IC8.6 3138.78,2062.99 v3(3153.54,2048.23) ; v3(3303.15,1478.35) IC2.1
  Bottom Layer w12: v3(3153.54,2048.23) 3153.54,1627.95 v3(3303.15,1478.35)
NetIC3_8: IC3.8 IC3.9 R7.1 | length 372.4
  Top Layer w12: R7.1@3538.41,2390.75 3538.41,2241.73 ccw(c3638.41,2241.73) 3638.41,2141.73 IC3.9 IC3.8
NetIC3_20: IC3.20 IC8.9 | length 465.3
  Top Layer w12: IC8.9 2998.03,2183.07 3000,2181.1 v2(3144.68,2181.1) ; IC3.20 3202.76,1907.48 v2(3202.76,1949.8)
  Bottom Layer w12: v2(3144.68,2181.1) 3202.76,2123.03 v2(3202.76,1949.8)
NetIC3_21: IC3.21 IC8.8 | length 533.1
  Top Layer w12: IC8.8@3056.14,2124.02 IC8.8 3243.6,2125.98 v2(3245.08,2124.51) ; IC3.21 3233.27,1850.39 3263.78,1880.91 v2(3263.78,1955.71)
  Bottom Layer w12: v2(3245.08,2124.51) 3263.78,2105.81 v2(3263.78,1955.71)
NetIC5_1: IC5.1 IC8.21 | length 1878.1
  Top Layer w12: IC5.1 1187.01,2167.32 v2(1188.98,2169.29) ; v2(2553.15,1815.94) 2553.15,1864.17 2580.71,1891.73 2594.49,1891.73 2635.83,1933.07 2635.83,1968.5 2667.32,2000 IC8.21
  Bottom Layer w12: v2(1188.98,2169.29) 1354.33,2169.29 1578.74,1944.88 1850.39,1944.88 2000,1795.28 2532.48,1795.28 v2(2553.15,1815.94)
NetIC5_5: IC5.5 R9.2 | length 101.5
  Top Layer w10: IC5.5 1094.49,2031.5 1116.11,2009.87 R9.2
NetIC6_1: IC6.1 IC7.6 R11.1 | length 467.7
  Top Layer w10: 1257.87,2159.45 1282.48,2134.84 1361.22,2134.84 1379.92,2153.54 1379.92,2246.06 1413.39,2279.53 IC7.6
  Top Layer w12: R11.1 1222.47,2124.04 1257.87,2159.45 IC6.1
NetIC7_2: IC7.2 L2.2 | length 280.6
  Top Layer w10: IC7.2 1598.43,2220.47 1625.98,2192.91 1625.98,2110.24 1643.7,2092.52 L2.2 L2.2@1744.09,2092.52
NetIC7_4: IC7.4 L2.1 | length 186.5
  Top Layer w10: IC7.4 1726.38,2259.84 L2.1@1744.09,2277.56
NetIC8_7: IC8.7 Q2.1 R6.1 | length 731.9
  Top Layer w12: R6.1 2836.64,1611.22 Q2.1 2941.93,1611.22 v3(2983.27,1652.56) ; IC8.7 3106.3,2094.49 v3(3107.28,2093.5)
  Bottom Layer w12: v3(2983.27,1652.56) 3107.28,1776.57 v3(3107.28,2093.5)
NetIC8_15: IC8.15 U2.11 | length 307.4
  Top Layer w10: U2.11 2781.5,2437.01 2790.35,2428.15 2790.35,2369.09 2767.72,2346.46 2767.72,2263.11 2780.05,2250.78 2780.72,2250.78 2808.58,2222.91 IC8.15
NetIC8_22: IC8.22 Q3.1 R12.1 | length 1255.5
  Top Layer w12: Q3.1 1728.37,1903.57 R12.1 1820.84,1903.57 1830.71,1893.7 v2(1830.71,1874.02) ; v2(2586.61,1774.61) 2610.24,1798.23 2610.24,1845.47 2619.09,1854.33 2651.57,1854.33 2674.21,1876.97 2674.21,1955.71 2687.01,1968.5 IC8.22
  Bottom Layer w12: v2(1830.71,1874.02) 1834.65,1874.02 1960.63,1748.03 2560.04,1748.03 v2(2586.61,1774.61)
NetIC8_26: IC8.26 Q1.1 R1.1 | length 1563.9
  Top Layer w12: R1.1 1470.5,1564.96 Q1.1 1620.08,1564.96 v2(1661.42,1606.3) ; IC8.26 2808.58,1795.75 v2(2824.8,1779.53)
  Bottom Layer w12: v2(1661.42,1606.3) 1708.66,1653.54 2547.24,1653.54 2570.87,1677.17 2779.53,1677.17 2824.8,1722.44 v2(2824.8,1779.53)
NetIC8_29: IC8.29 U3.2 | length 1276.6
  Top Layer w12: U3.2 v2(2362.2,2216.54) ; v2(2862.2,2031.5) 2882.87,2010.83 2882.87,1905.51 2903.07,1885.32 IC8.29
  Bottom Layer w12: v2(2362.2,2216.54) 2452.76,2307.09 2586.61,2307.09 v2(2862.2,2031.5) v2@2865.16,2034.45
NetIC8_30: IC8.30 U3.1 | length 1356.1
  Top Layer w12: U3.1 1944.88,2279.53 1948.82,2275.59 v2(2326.77,2275.59) ; v2(2934.06,2033.46) 2934.06,1849.41 IC8.30
  Bottom Layer w12: v2(2326.77,2275.59) 2413.39,2362.2 2610.24,2362.2 2934.06,2038.39 v2(2934.06,2033.46)
NetL1_1: L1.1 R7.2 | length 87
  Top Layer w12: L1.1@3586.61,2471.46 3599.38,2458.69 R7.2@3599.38,2389.76
NRST: C10.2 IC8.4 P2.2 | length 1405.9
  Top Layer w16: P2.2 2659.84,1700.79 2948.82,1700.79 3119.09,1871.06 3119.09,1971.46 3090.55,2000 IC8.4 ; 3122.05,1976.38 3145.67,2000 3216.54,2000 3276.57,2060.04 3276.57,2361.22 3226.38,2411.42 C10.2
SWCLK: IC8.24 P2.3 | length 522.9
  Top Layer w12: IC8.24 2724.41,1909.45 2726.38,1907.48 v2(2777.56,1907.48)
  Bottom Layer w12: P2.3 2807.09,1629.92 2874.02,1696.85 2874.02,1811.02 v2(2777.56,1907.48)
SWDIO: IC8.23 P2.1 | length 816.3
  Top Layer w12: IC8.23 2724.41,1940.94 2728.35,1937.01 2830.71,1937.01 v2(2831.69,1937.99)
  Bottom Layer w12: P2.1 2637.8,1578.74 2834.65,1578.74 2925.2,1669.29 2925.2,1844.49 v2(2831.69,1937.99)
Touch_plate: R2.2 | length 185.1
  Top Layer w12: v3(3519.68,1662.4) 3520.67,1663.39 3591.54,1663.39 3624.02,1630.91 R2.2
pads on no net: IC1.1 IC1.5 IC1.6 IC1.7 IC1.8 IC1.14 IC3.1 IC5.6 IC6.2 IC6.3 IC6.4 IC8.2 IC8.3 IC8.27 IC8.28 J2.2 J2.3 J2.4 U1.4 U2.3 U2.8 U2.9 U2.13 U2.15 U2.16 U3.14 U3.23 U3.33 U3.34

## Polygon pours and split planes (outlines as drawn)
GND on Top Layer "Top Layer-GND" (solid, remove dead copper, pour order 8): 984.25,2598.43 984.25,1417.32 3740.16,1417.32 3740.16,2598.43
GND on Bottom Layer "Bottom Layer-GND" (solid, pour order 10): 984.25,2598.43 984.25,1417.32 3740.16,1417.32 3740.16,2598.43

## Keep-outs
Keep-Out Layer:
  the board outline again, w19.68

## Other copper
Bottom Layer:
  region net Touch_plate: 3322.83,2354.33 3322.83,1841.62 ccw(c3422.83,1841.62) 3352.12,1770.91 3461.85,1661.18 ccw(c3529.08,1723.47) 3525.59,1631.89 3544.29,1635.83 3551.42,1642.95 ccw(c3480.71,1713.66) 3580.71,1713.67 3580.71,2082.68 3515.51,2147.88 cw(c3586.22,2218.59) 3486.22,2218.59 3486.22,2297.03 ccw(c3435.82,2297.04) 3471.46,2332.68 ccw(c3414.43,2275.65) 3414.43,2356.3 3323.82,2356.3

## Dimensions
984.25,2598.43 to 984.25,1417.32 on Sizes
984.25,2598.43 to 3740.16,2598.43 on Sizes

## Text inside footprints (layer, text, board x,y; h text height)
J1: Top Overlay "D" at 1591.54,2395.67 h39.37 r180
U3: Mechanical 13 "ANTENNA" at 1971.85,2419.68 h73.82